# Altium PCB educationalBoard.PcbDoc
Units mm, origin at the board's own origin, x right, y up, seen from the top; angles counter-clockwise.
Board outline 89.28 x 76.33 mm, 2 copper layers (Top Layer, Bottom Layer); 78 components, 71 nets, 292 pads, 30 vias.
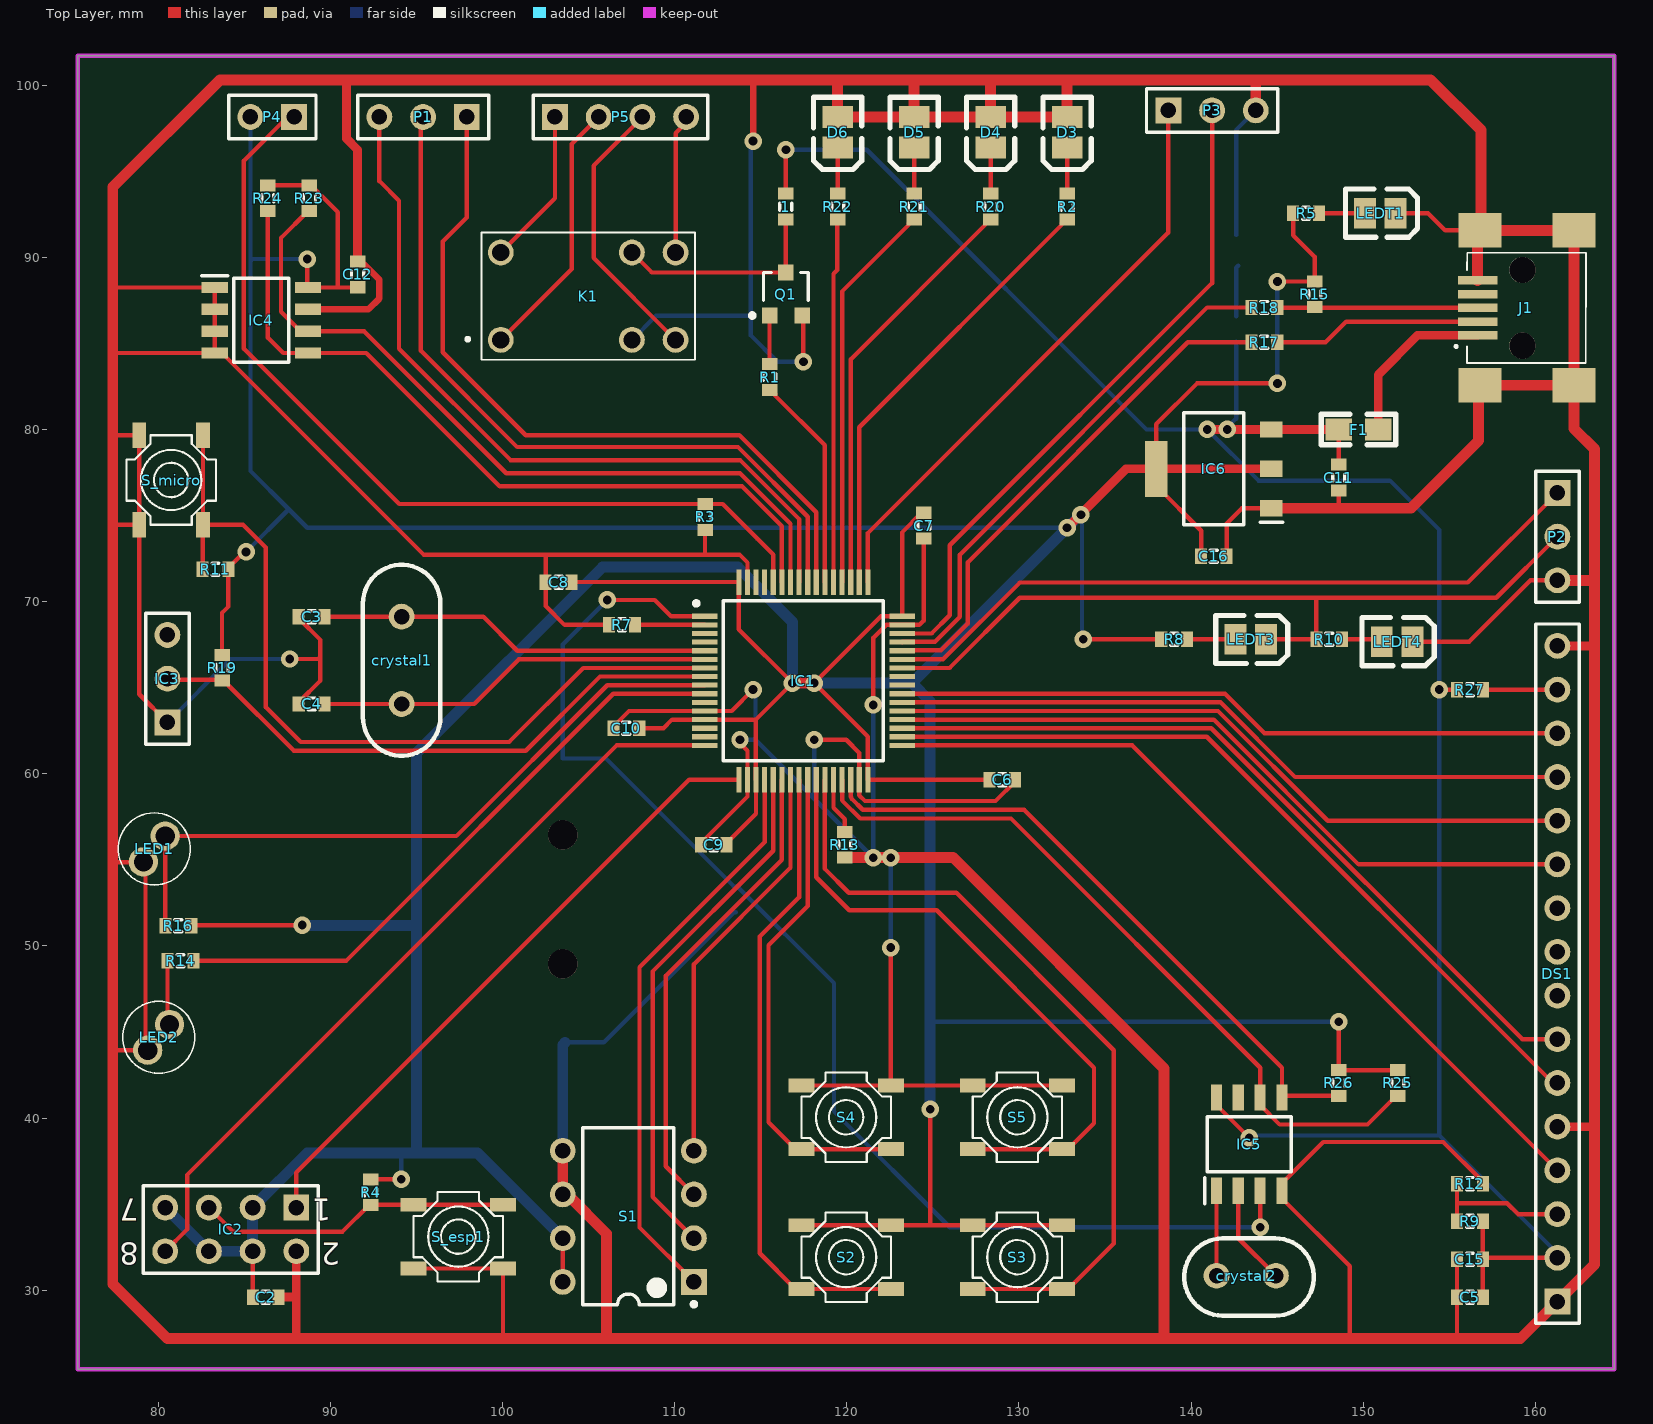
[diagram p0: Top Layer view]
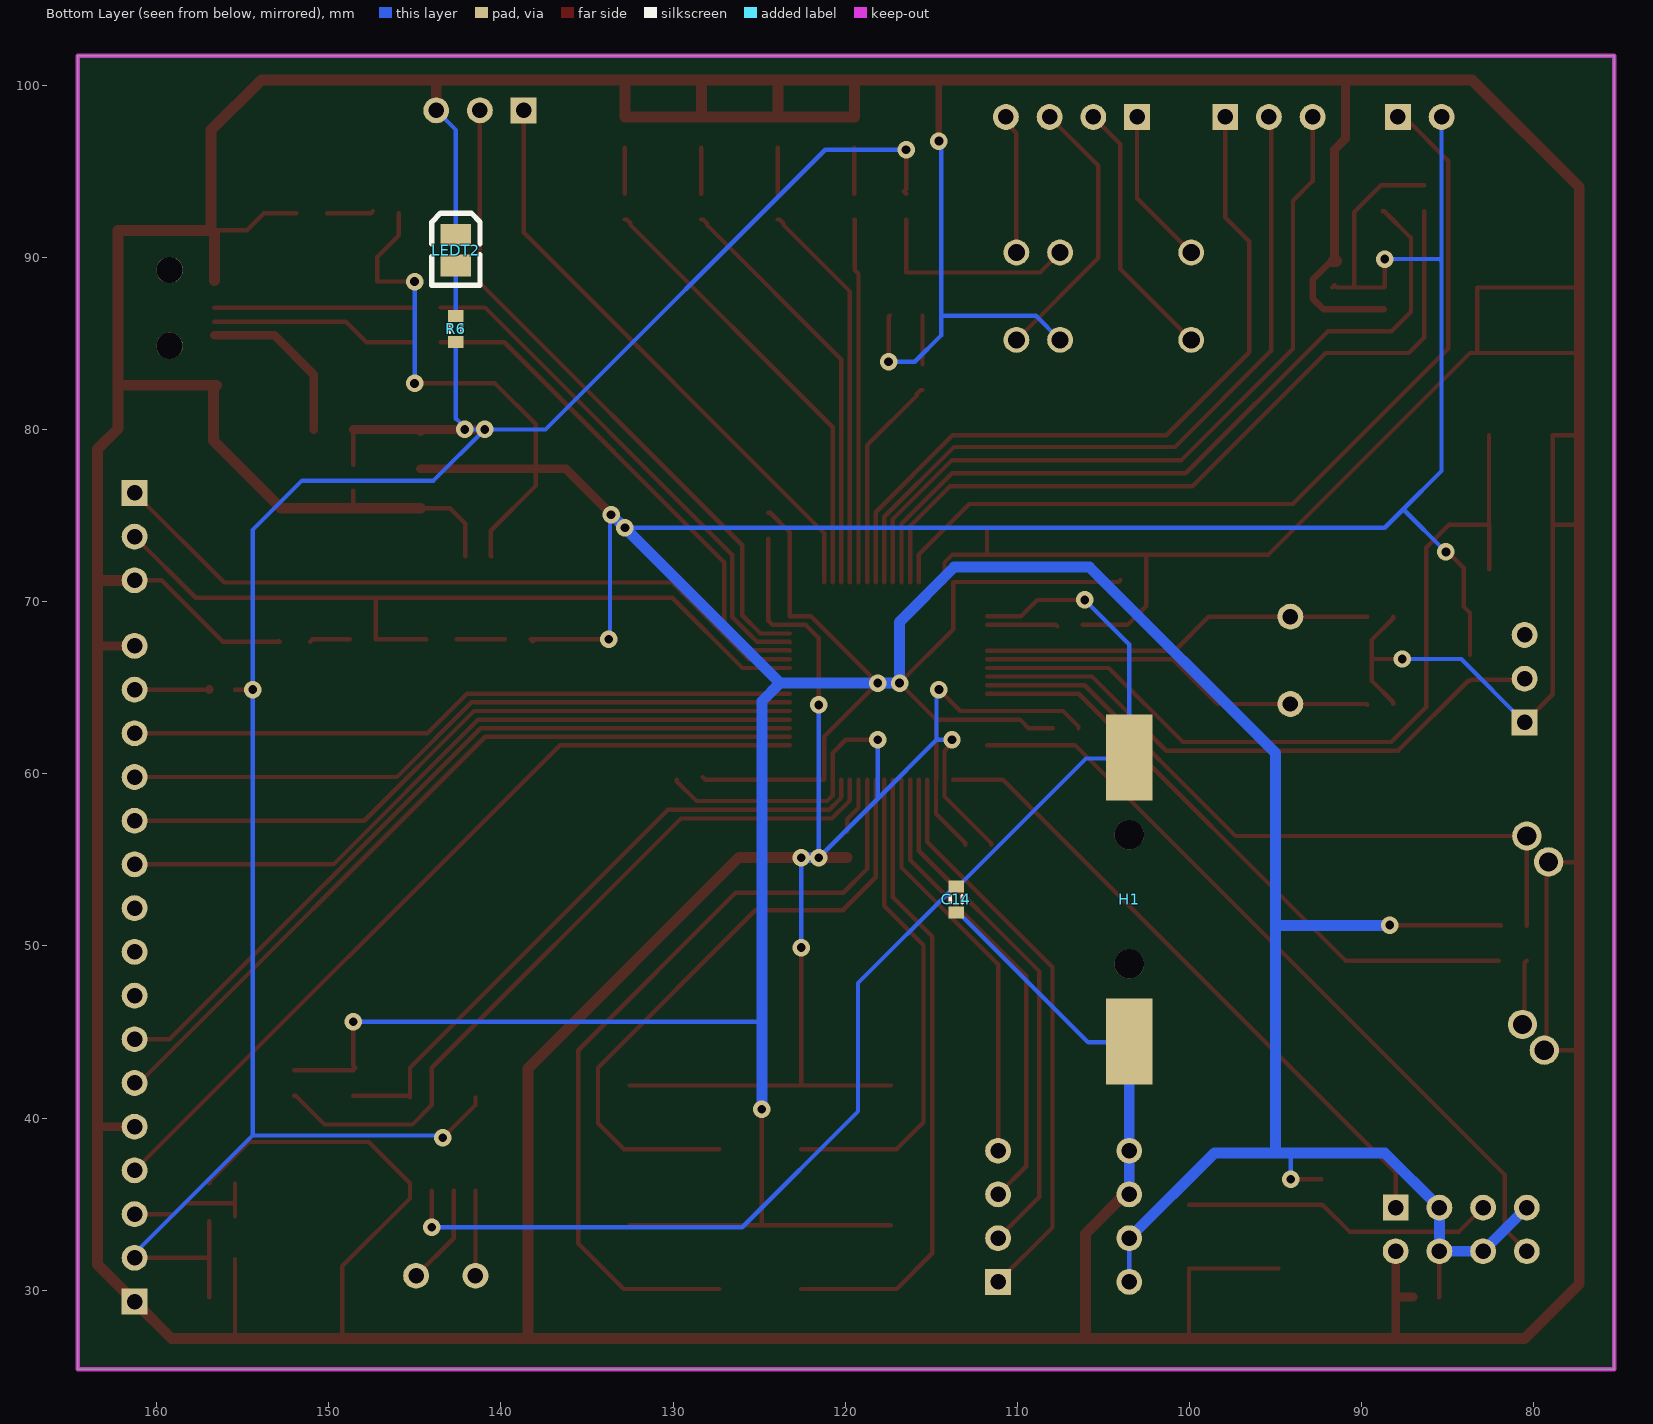
[diagram p1: Bottom Layer view, seen from below]

## Layer stack, top to bottom
Top Solder: solder mask 0.0102, Solder Resist, Dk 3.5
Top Layer: signal copper 0.0356
Dielectric 1: dielectric 0.32, FR-4, Dk 4.8
Bottom Layer: signal copper 0.0356
Bottom Solder: solder mask 0.0102, Solder Resist, Dk 3.5

## Board outline
75.311,25.4 164.592,25.4 164.592,101.727 75.311,101.727

## Design rules (kind name [scope] priority, off if disabled: settings)
Clearance [All] p1: gap=0.2 ignorepadtopadclearanceinfootprint=FALSE
PolygonConnect [All] p1: connectstyle=Relief reliefconductorwidth=0.254 reliefentries=4 polygonreliefangle="90 Angle" airgapwidth=0.254
RoutingVias [All] p1: holewidth=0.711 width=1.27 viastyle="Through Hole" minholewidth=0.711 minwidth=1.27 maxholewidth=0.711 maxwidth=1.27
SolderMaskExpansion [All] p1: expansion=0.102
Width [All] p1: maxlimit=1.27 minlimit=0.254 preferedwidth=0.254 minimp=50.000000 maximp=50.000000 favimp=50.000000
30 further rules are at their usual default settings.

## Components (designator, comment, footprint, x,y, rotation, side; value= is the part's Value field where it differs from the comment)
1 "Res" J1-0603 116.459,92.964 r90 top value=330
C2 "C0603" J1-0603 86.233,29.591 r0 top value=0.1uF
C3 "C0603" J1-0603 88.9,69.14 r0 top value=20pF
C4 "C0603" J1-0603 88.9,64.06 r0 top value=20pF
C5 "C0603" J1-0603 156.21,29.591 r180 top value=0.1uF
C6 "C0603" J1-0603 129.032,59.663 r0 top value=0.1uF
C7 "C0603" J1-0603 124.46,74.422 r270 top value=0.1uF
C8 "C0603" J1-0603 103.251,71.145 r180 top value=0.1uF
C9 "C0603" J1-0603 112.268,55.88 r180 top value=0.1uF
C10 "C0603" J1-0603 107.188,62.655 r180 top value=0.1uF
C11 "C0603" J1-0603 148.588,77.216 r270 top value=0.1uF
C12 "C0603" J1-0603 91.567,89.027 r90 top value=0.1uF
C14 "C0603" J1-0603 113.538,52.705 r270 bottom value=0.1uF
C15 "C0603" J1-0603 156.21,31.792 r180 top value=0.1uF
C16 "C0603" J1-0603 141.321,72.644 r0 top value=0.1uF
crystal1 "clockProducerDeep" "deep crystal" 93.98,66.675 r180 top
crystal2 "clockProducerDeep" "Deep Crystal small" 144.907,30.861 r90 top
D3 "LED3" 3518 132.8,97.282 r270 top
D4 "LED3" 3518 128.355,97.282 r270 top
D5 "LED3" 3518 123.91,97.282 r270 top
D6 "LED3" 3518 119.465,97.282 r270 top
DS1 "161A-BA-BC" HDR1X16 161.29,29.337 r90 top
F1 "Fuse 1" 0805 149.733,80.01 r0 top
H1 "2894" 2894 103.493,52.959 r270 bottom
IC1 "STM32F103RCT6" QFP50P1200X1200X160-64N 117.475,65.405 r0 top
IC2 "ESP-01" HDR2X4 88.011,34.798 r180 top
IC3 "LM335AZ_NOPB" HDR1X3 80.518,62.992 r90 top
IC4 "AT24C04C-SSHM-T" SOIC127P600X175-8N 85.979,86.36 r0 top
IC5 "DS1307Z+" SOIC127P600X175-8N 143.383,38.481 r90 top
IC6 "AMS1117-3.3" SOT229P700X180-4N 141.321,77.724 r180 top
J1 "usb type B" 0474910001 156.158,85.481 r180 top
K1 "TR5V_M-S-Z" TR5VMSZ 104.521,87.757 r0 top
LED1 "OP505A" OP505A 79.121,54.888 r90 top
LED2 "OP505A" OP505A 79.375,43.942 r90 top
LEDT1 "" 3518 151.003,92.583 r0 top
LEDT2 "" 3518 142.621,90.424 r90 bottom
LEDT3 "" 3518 143.464,67.812 r0 top
LEDT4 "" 3518 151.973,67.685 r0 top
P1 "Header 3" HDR1X3 97.917,98.171 r180 top
P2 "Header 3" HDR1X3 161.29,76.327 r270 top
P3 "Header 3" HDR1X3 138.684,98.552 r0 top
P4 "Header 2" HDR1X2 87.884,98.171 r180 top
P5 "Header 4" HDR1X4 103.039,98.171 r0 top
Q1 "2N2222" SOT-23 116.459,87.884 r0 top
R1 "Res" J1-0603 115.509,83.058 r90 top value=10K
R2 "Res1" j1-0603 132.8,92.964 r270 top value=330
R3 "Res1" J1-0603 111.76,74.93 r270 top value=10K
R4 "Res1" J1-0603 92.329,35.687 r90 top value=10K
R5 "Res1" j1-0603 146.685,92.583 r0 top value=330
R6 "Res1" j1-0603 142.621,85.852 r90 bottom value=330
R7 "Res1" J1-0603 106.934,68.655 r0 top value=10K
R8 "Res1" j1-0603 139.019,67.812 r0 top value=330
R9 "Res1" J1-0603 156.21,33.994 r0 top value=4.7K
R10 "Res1" j1-0603 148.036,67.812 r0 top value=330
R11 "Res1" J1-0603 83.312,71.882 r0 top value=10K
R12 "Res1" J1-0603 156.21,36.195 r180 top value=4.7K
R13 "Res1" J1-0603 119.888,55.88 r270 top value=10K
R14 "Res1" J1-0603 81.28,49.149 r180 top value=330
R15 "Res1" J1-0603 147.181,87.872 r90 top value=1.5k
R16 "Res1" J1-0603 81.153,51.181 r180 top value=1.5k
R17 "Res1" J1-0603 144.26,85.078 r180 top value=22
R18 "Res1" J1-0603 144.26,87.1 r180 top value=22
R19 "Res1" J1-0603 83.693,66.167 r90 top value=1.5k
R20 "Res1" j1-0603 128.355,92.964 r90 top value=330
R21 "Res1" j1-0603 123.91,92.964 r90 top value=330
R22 "Res1" j1-0603 119.465,92.964 r90 top value=330
R23 "Res1" J1-0603 88.773,93.445 r270 top value=4.7k
R24 "Res1" J1-0603 86.36,93.445 r270 top value=4.7k
R25 "Res1" J1-0603 152.019,42.037 r270 top value=4.7k
R26 "Res1" J1-0603 148.588,42.037 r270 top value=4.7k
R27 "Res1" J1-0603 156.21,64.897 r0 top value=330
S1 "SW-DIP4" DIP-8 107.303,34.29 r180 top
S2 "SW-PB" button 119.973,32.004 r180 top
S3 "SW-PB" button 129.925,32.004 r180 top
S4 "SW-PB" button 119.973,40.132 r180 top
S5 "SW-PB" button 129.925,40.132 r180 top
S_esp1 "SW-PB" button 97.409,33.02 r0 top
S_micro "SW-PB" button 80.645,77.089 r270 top

## Footprints (in the part's own frame and the unit in brackets; to place one, negate y for a bottom-side part, rotate by r counter-clockwise, add the part's x,y. Pads: shape width x height; smd on the part's side, far side on the other; paste and mask are expansions set on the pad)
0805 [mil]
  rect 60x50 smd: 1(-45,0) 2(45,0)
  silkscreen extent -85,-35 85,35
2894 [mm]
  rect 5x2.7 smd: 1(-8,0) 2(8.5,0)
  round 1.7 hole 1.7: 9(-3.5,0) 10(4,0)
3518 [mil]
  rect 50x70 smd: 1(35,0) 2(-35,0)
  silkscreen extent -80,-55 85,55
0474910001 [mm]
  rect 2.3x0.5 smd: 1(-0.5,0) 2(-0.5,-0.8) 3(-0.5,-1.6) 4(-0.5,-2.4) 5(-0.5,-3.2)
  round 1.524 hole 1.524: 7(-3.1,0.6) 8(-3.1,-3.8)
  rect 2.5x2 smd: MP1(-6.1,2.9) MP2(-0.625,2.9) MP3(-0.625,-6.1) MP4(-6.1,-6.1)
  silkscreen extent -6.8,-4.8 0.8,1.6
button [mm]
  rect 1.5x0.8 smd: 1(-2.587,1.939) 1(2.613,1.939) 2(-2.587,-1.761) 2(2.613,-1.761)
  silkscreen extent -2.59,-2.51 2.61,2.69, body extent -2.59,-2.51 2.64,2.69, height 2.2
"deep crystal" [mm]
  round 1.5 hole 0.9: 1(-0.15,-2.465) 2(-0.15,2.615)
  silkscreen extent -2.4,-5.47 2.1,5.62, body extent -2.44,-5.46 2.16,5.54, height 3.8
"Deep Crystal small" [mm]
  round 1.5 hole 0.9: 1(-0.025,-0.025) 2(-0.025,3.425)
  silkscreen extent -2.35,-2.23 2.15,5.3, body extent -2.4,-1.96 2.2,5.01, height 0.25
DIP-8 [mm] "DIP; 8 Leads; Row Spacing 7.62 mm; Pitch 2.54 mm"
  rect 1.5x1.5 hole 0.9: 1(-3.81,3.81)
  round 1.5 hole 0.9: 2(-3.81,1.27) 3(-3.81,-1.27) 4(-3.81,-3.81) 5(3.81,-3.81) 6(3.81,-1.27) 7(3.81,1.27) 8(3.81,3.81)
  silkscreen extent -3.94,-5.15 2.65,5.23, body extent -3.6,-5.15 3.6,5.15, height 5.08
HDR1X2 [mm] "Connector; Header; 2 Position"
  rect 1.5x1.5 hole 0.9: 1(0,0)
  round 1.5 hole 0.9: 2(2.54,0)
  silkscreen extent -1.27,-1.27 3.81,1.27
HDR1X3 [mm] "Connector; Header; 3 Position"
  rect 1.5x1.5 hole 0.9: 1(0,0)
  round 1.5 hole 0.9: 2(2.54,0) 3(5.08,0)
  silkscreen extent -1.27,-1.27 6.35,1.27
HDR1X4 [mm] "Connector; Header; 4 Position"
  rect 1.5x1.5 hole 0.9: 1(0,0)
  round 1.5 hole 0.9: 2(2.54,0) 3(5.08,0) 4(7.62,0)
  silkscreen extent -1.27,-1.27 8.89,1.27
HDR1X16 [mm] "Connector; Header; 16 Position"
  rect 1.5x1.5 hole 0.9: 1(0,0)
  round 1.5 hole 0.9: 2(2.54,0) 3(5.08,0) 4(7.62,0) 5(10.16,0) 6(12.7,0) 7(15.24,0) 8(17.78,0) 9(20.32,0) 10(22.86,0) 11(25.4,0) 12(27.94,0) 13(30.48,0) 14(33.02,0) 15(35.56,0) 16(38.1,0)
  silkscreen extent -1.27,-1.27 39.37,1.27
HDR2X4 [mm] "Connector; Header; 4x2 Position"
  rect 1.5x1.5 hole 0.9: 1(0,0)
  round 1.5 hole 0.9: 2(0,2.54) 3(2.54,0) 4(2.54,2.54) 5(5.08,0) 6(5.08,2.54) 7(7.62,0) 8(7.62,2.54)
  silkscreen extent -1.27,-1.27 8.89,3.81
J1-0603 [mm] "Chip Resistor, Body 1.6x0.8mm, IPC High Density"
  rect 0.7x0.9 smd: 1(-0.75,0) 2(0.75,0)
  silkscreen extent -0.2,-0.35 0.2,0.35, body extent -0.85,-0.48 0.85,0.48, height 0.9
j1-0603 [mm] "Chip Resistor, Body 1.6x0.8mm, IPC High Density"
  rect 0.7x0.9 smd: 1(-0.75,0) 2(0.75,0)
  silkscreen extent -0.2,-0.35 0.2,0.35, body extent -0.85,-0.48 0.85,0.48, height 0.9
OP505A [mm]
  round 1.7 hole 1.11: 1(0,0) 2(1.5,-1.27)
  silkscreen extent -1.34,-2.73 2.85,1.46, body extent -1.35,-2.73 2.85,1.46, height 5.94
QFP50P1200X1200X160-64N [mm]
  rect 1.475x0.3 smd: 1(-5.738,3.75) 2(-5.738,3.25) 3(-5.738,2.75) 4(-5.738,2.25) 5(-5.738,1.75) 6(-5.738,1.25) 7(-5.738,0.75) 8(-5.738,0.25) 9(-5.738,-0.25) 10(-5.738,-0.75) 11(-5.738,-1.25) 12(-5.738,-1.75) 13(-5.738,-2.25) 14(-5.738,-2.75) 15(-5.738,-3.25) 16(-5.738,-3.75) 33(5.738,-3.75) 34(5.738,-3.25) 35(5.738,-2.75) 36(5.738,-2.25) 37(5.738,-1.75) 38(5.738,-1.25) 39(5.738,-0.75) 40(5.738,-0.25) 41(5.738,0.25) 42(5.738,0.75) 43(5.738,1.25) 44(5.738,1.75) 45(5.738,2.25) 46(5.738,2.75) 47(5.738,3.25) 48(5.738,3.75)
  rect 0.3x1.475 smd: 17(-3.75,-5.738) 18(-3.25,-5.738) 19(-2.75,-5.738) 20(-2.25,-5.738) 21(-1.75,-5.738) 22(-1.25,-5.738) 23(-0.75,-5.738) 24(-0.25,-5.738) 25(0.25,-5.738) 26(0.75,-5.738) 27(1.25,-5.738) 28(1.75,-5.738) 29(2.25,-5.738) 30(2.75,-5.738) 31(3.25,-5.738) 32(3.75,-5.738) 49(3.75,5.738) 50(3.25,5.738) 51(2.75,5.738) 52(2.25,5.738) 53(1.75,5.738) 54(1.25,5.738) 55(0.75,5.738) 56(0.25,5.738) 57(-0.25,5.738) 58(-0.75,5.738) 59(-1.25,5.738) 60(-1.75,5.738) 61(-2.25,5.738) 62(-2.75,5.738) 63(-3.25,5.738) 64(-3.75,5.738)
  silkscreen extent -6.35,-4.65 4.65,4.65, body extent -6,-6 6,6, height 1.6
SOIC127P600X175-8N [mm]
  rect 1.525x0.65 smd: 1(-2.712,1.905) 2(-2.712,0.635) 3(-2.712,-0.635) 4(-2.712,-1.905) 5(2.712,-1.905) 6(2.712,-0.635) 7(2.712,0.635) 8(2.712,1.905)
  silkscreen extent -3.47,-2.45 1.6,2.58, body extent -3,-2.45 3,2.45, height 1.75
SOT229P700X180-4N [mm]
  rect 1.3x0.95 smd: 1(-3.35,2.29) 2(-3.35,0) 3(-3.35,-2.29)
  rect 1.3x3.25 smd: 4(3.35,0)
  silkscreen extent -4,-3.25 1.75,3.25, body extent -3.5,-3.25 3.5,3.25, height 1.8
SOT-23 [mm] "SOT-23; 3 Leads; Body 3.0 x 2.6 mm, inc. leads (LxW max)"
  rect 0.9x0.95 smd: 1(0,1.25) 2(-0.95,-1.25) 3(0.95,-1.25)
  silkscreen extent -2.07,-1.37 1.3,1.25, body extent -1.33,-0.38 1.33,1.25, height 2
TR5VMSZ [mm]
  round 1.5 hole 1: 1(-4.63,-2.54) 2(2.99,-2.54) 3(5.53,-2.54) 4(5.53,2.54) 5(2.99,2.54) 6(-4.63,2.54)
  silkscreen extent -6.65,-3.7 6.65,3.7, body extent -5.75,-3.7 6.65,3.7, height 9.1

## Part data
1 R1: "Semiconductor Resistor", LatestRevisionDate=17-Jul-2002, LatestRevisionNote="Re-released for DXP Platform.", PackageReference=AXIAL-0.5, Published=8-Jun-2000, Publisher="Altium Limited"
C2 C3 C4 C5 C6 C7 C8 C9 C10 C11 C12 C14 C15 C16: "Ceramic Chip Capacitor - Standard", PackageDocument=Mar-2001, Code_IPC="1608 [0603]", Code_JEITA=0603, ComponentLink1Description="Manufacturer Link", ComponentLink1URL=http://www.kemet.com/, ComponentLink2Description=Datasheet, ComponentLink2URL=http://www.kemet.com/kemet/web/homepage/kechome.nsf/vapubfilesname/F3102TA.pdf/$file/F3102TA.pdf, DatasheetDocument=Mar-2001, LatestRevisionDate=19-Mar-2004, LatestRevisionNote="Silkscreen size reduced.", Note="Footprint corresponds to dimensions for bulk cassette packaging. This case size has tightened tolerances.", PackageReference=0603, Published=17-Jul-2002, Publisher="Altium Limited"
crystal1 crystal2: library part "deep crystal"
D3 D4 D5 D6: "Typical BLUE SiC LED", DatasheetVersion=16-Apr-2002, LatestRevisionDate=17-Dec-2003, LatestRevisionNote="PCB Footprint replaced.", PackageDescription="SM LED; 2 C-Bend Leads; Body 3.5 x 2.8 x 1.9 mm, inc leads (LxWxH typ)", PackageReference=3.5X2.8X1.9, PackageVersion=16-Apr-2002, Published=8-Jun-2000, Publisher="Altium Limited"
DS1: "Display", Manufacturer_Name=Displaytech, Datasheet Link=https://docs-emea.rs-online.com/webdocs/06dd/0900766b806dda14.pdf, Height=11mm, Manufacturer_Part_Number=161A-BA-BC
F1: "Fuse", LatestRevisionDate=17-Jul-2002, LatestRevisionNote="Re-released for DXP Platform.", PackageDescription="Thru-Hole; 2 Leads", PackageReference=PIN-W2/E2.8, Published=8-Jun-2000, Publisher="Altium Limited"
H1: "Hardware", Manufacturer_Name="Keystone Electronics", Mouser Part Number=534-2894, Datasheet Link=https://www.keyelco.com/product-pdf.cfm?p=14467, Height=2.42mm, Manufacturer_Part_Number=2894, Mouser Price/Stock=https://www.mouser.co.uk/ProductDetail/Keystone-Electronics/2894?qs=u16ybLDytRb94n%2F3dXyVLQ%3D%3D
IC1: "Integrated Circuit", Manufacturer_Name=STMicroelectronics, Mouser Part Number=511-STM32F103RCT6, Arrow Part Number=STM32F103RCT6, Arrow Price/Stock=https://www.arrow.com/en/products/stm32f103rct6/stmicroelectronics, Datasheet Link=http://www.st.com/st-web-ui/static/active/en/resource/technical/document/datasheet/CD00191185.pdf, Height=1.6mm, Manufacturer_Part_Number=STM32F103RCT6, Mouser Price/Stock=https://www.mouser.co.uk/ProductDetail/STMicroelectronics/STM32F103RCT6?qs=%252BB84zevwoRA6TYzZIgOIoA%3D%3D
IC2: "Integrated Circuit", Manufacturer_Name=Ai-Thinker, Datasheet Link=http://wiki.ai-thinker.com/_media/esp8266/esp8266_series_modules_user_manual_v1.1.pdf, Height=2mm, Manufacturer_Part_Number=ESP-01
IC3: "Integrated Circuit", Arrow Part Number=LM335AZ/NOPB, Manufacturer_Name="Texas Instruments", Mouser Part Number=926-LM335AZ/NOPB, Arrow Price/Stock=https://www.arrow.com/en/products/lm335aznopb/texas-instruments, Datasheet Link=http://www.ti.com/general/docs/suppproductinfo.tsp?distId=10&gotoUrl=http%3A%2F%2Fwww.ti.com%2Flit%2Fgpn%2Flm135, Height=3.25mm, Manufacturer_Part_Number=LM335AZ/NOPB, Mouser Price/Stock=https://www.mouser.co.uk/ProductDetail/Texas-Instruments/LM335AZ-NOPB?qs=X1J7HmVL2ZHLFIuAm4Dkiw%3D%3D
IC4: "Integrated Circuit", Manufacturer_Name=Microchip, Mouser Part Number=556-AT24C04C-SSHM-T, Arrow Part Number=AT24C04C-SSHM-T, Arrow Price/Stock=https://www.arrow.com/en/products/at24c04c-sshm-t/microchip-technology, Datasheet Link=https://datasheet.lcsc.com/szlcsc/Microchip-Tech-AT24C04C-SSHM-T_C6205.pdf, Height=1.75mm, Manufacturer_Part_Number=AT24C04C-SSHM-T, Mouser Price/Stock=https://www.mouser.co.uk/ProductDetail/Microchip-Technology-Atmel/AT24C04C-SSHM-T?qs=rNaVQffb%252BtcPg4SMgvVriA%3D%3D
IC5: "Integrated Circuit", Manufacturer_Name="Maxim Integrated", Mouser Part Number=700-DS1307Z, Datasheet Link=http://datasheets.maximintegrated.com/en/ds/DS1307.pdf, Height=1.75mm, Manufacturer_Part_Number=DS1307Z+, Mouser Price/Stock=https://www.mouser.co.uk/ProductDetail/Maxim-Integrated/DS1307Z%2b?qs=0Y9aZN%252BMVCUvNDMAh9aCtw%3D%3D
IC6: library part AMS1117-1.5, "Integrated Circuit", Manufacturer_Name=ams, Datasheet Link=http://www.advanced-monolithic.com/pdf/ds1117.pdf, Height=1.8mm, Manufacturer_Part_Number=AMS1117-1.5
J1: library part 0474910001, "Connector", Manufacturer_Name=Molex, Arrow Part Number=0474910001, Arrow Price/Stock=https://www.arrow.com/en/products/0474910001/molex, Datasheet Link=https://www.molex.com/pdm_docs/sd/474910001_sd.pdf, Height=2.94mm, Manufacturer_Part_Number=0474910001
K1: "Relay or Contactor", Manufacturer_Name="TIANBO Electronics", Manufacturer_Part_Number="TR5V M-S-Z", Datasheet Link=http://www.datasheetspdf.com/pdf/702912/TIANBOGANGLIANELECTRONICS/TR5V/1, Height=9mm
LED1 LED2: "LED (Multiple)", Manufacturer_Name="OPTEK TECHNOLOGY", Mouser Part Number=828-OP505A, Arrow Part Number=OP505A, Arrow Price/Stock=https://www.arrow.com/en/products/op505a/optek-technology, Datasheet Link=http://docs-emea.rs-online.com/webdocs/13ff/0900766b813ff04e.pdf, Height=5.84mm, Manufacturer_Part_Number=OP505A, Mouser Price/Stock=https://www.mouser.co.uk/ProductDetail/Optek-TT-Electronics/OP505A?qs=MYMjFsmMg9aCx6EE%252BoFElA%3D%3D
LEDT1 LEDT2 LEDT3 LEDT4: library part LED3, "Typical BLUE SiC LED", PackageDocument=16-Apr-2002, DatasheetDocument=16-Apr-2002, LatestRevisionDate=17-Dec-2003, LatestRevisionNote="PCB Footprint replaced.", PackageReference=3.5X2.8X1.9, Published=8-Jun-2000, Publisher="Altium Limited"
P1 P2 P3: "Header, 3-Pin", LatestRevisionDate=17-Jul-2002, LatestRevisionNote="Re-released for DXP Platform.", Publisher="Altium Limited"
P4: "Header, 2-Pin", LatestRevisionDate=17-Jul-2002, LatestRevisionNote="Re-released for DXP Platform.", Publisher="Altium Limited"
P5: "Header, 4-Pin", LatestRevisionDate=17-Jul-2002, LatestRevisionNote="Re-released for DXP Platform.", Publisher="Altium Limited"
Q1: "NPN Bipolar Transistor", Code_JEDEC=TO-226-AA, LatestRevisionDate=17-Jul-2002, LatestRevisionNote="Re-released for DXP Platform.", PackageReference=TO-226, Published=8-Jun-2000, Publisher="Altium Limited"
R2 R3 R4 R5 R6 R7 R8 R9 R10 R11 R12 R13 R14 R15 R16 R17 R18 R19 R20 R21 R22 R23 R24 R25 R26 R27: "Resistor", LatestRevisionDate=17-Jul-2002, LatestRevisionNote="Re-released for DXP Platform.", PackageReference=AXIAL-0.3, Published=8-Jun-2000, Publisher="Altium Limited"
  R3 R4 R7 R9 R11 R12 R13 R14 R15 R16 R17 R18 R19 R23 R24 R25 R26 R27: PackageDescription="Axial Device, Thru-Hole; 2 Leads; 0.3 in Pin Spacing"
S1: "DIP Switch", LatestRevisionDate=17-Jul-2002, LatestRevisionNote="Re-released for DXP Platform.", PackageReference=DIP-8, Published=24-Mar-1999, Publisher="Altium Limited"
S2 S3 S4 S5 S_esp1 S_micro: "Switch", LatestRevisionDate=17-Jul-2002, LatestRevisionNote="Re-released for DXP Platform.", PackageReference=SPST-2, Published=24-Mar-1999, Publisher="Altium Limited"
  S2 S3 S4 S5: PackageDescription="Switch; 2 Leads"

## Via types
v1: diameter 1.016, hole 0.508, Top Layer to Bottom Layer, 30 vias

## Nets (pads, with @x,y where several pads share a name; then routed paths per layer and width w, separated by ;. In a path a pad name is that pad's centre, name@x,y a point inside that pad or via, vN(x,y) a via of type N, cw(c..) or ccw(c..) an arc to the next point about the centre after c; other vN are vias at no path point)
3.3v: C2.1 C6.1 C7.1 C8.1 C9.1 C10.1 C12.1 C16.1 IC1.13 IC1.19 IC1.32 IC1.48 IC1.64 IC2.3 IC2.4 IC2.6 IC2.7 IC4.8 IC6.2 IC6.4 P4.2 R4.2 R5.1 R8.1 R11.2 R15.2 R16.1 R19.2 R23.1 R24.1 R25.1 R26.1 S1.7 S1.8 S2.2 S3.2 | length 421.7
  Top Layer w0.254: R16.1 81.903,51.212 v1(88.361,51.212) ; R19.2 83.693,69.354 84.062,69.723 R11.2 84.062,71.982 84.978,72.898 v1(85.09,72.898) ; IC2.4 85.477,32.252 85.477,29.597 C2.1 ; IC2.3 IC2.3@85.477,34.792 ; R24.1 R23.1 88.873,94.195 90.424,92.644 90.424,88.265 ; v1(88.646,89.916) 88.646,88.31 IC4.8 90.424,88.265 ; C12.1@91.567,88.384 91.448,88.265 90.424,88.265 ; C12.1@91.567,88.404 C12.1@91.706,88.265 ; R4.2 92.335,36.443 94.101,36.443 v1(94.107,36.449) ; S1.8 S1.7 ; C8.1@104.001,71.247 104.103,71.145 113.723,71.145 IC1.64 113.725,68.393 v1(116.84,65.278) 114.717,63.155 ; C10.1 109.347,62.655 109.847,63.155 IC1.13 114.717,63.155 ; C9.1 113.018,55.98 114.725,57.687 IC1.19 114.717,59.675 114.717,63.155 ; S2.2@117.359,33.765 122.559,33.765 124.841,33.765 ; C7.1 124.36,75.172 123.213,74.025 IC1.48 121.987,69.155 v1(118.11,65.278) 121.225,62.163 IC1.32 128.132,59.667 C6.1@128.282,59.817 ; v1(124.841,40.513) 124.841,33.765 ; S3.2@132.512,33.765 127.312,33.765 124.841,33.765 ; v1(133.731,67.818) R8.1@138.021,67.818 ; C16.1 140.589,72.662 140.589,74.131 137.971,76.749 IC6.4 137.971,80.313 140.347,82.689 v1(145.022,82.689) ; v1(145.022,88.61) 147.169,88.61 R15.2 147.181,90.043 145.935,91.289 R5.1 ; v1(148.59,45.593) 148.59,43.039 148.463,42.912 R26.1 R25.1 ; R8.1@138.021,67.818 138.148,67.691 R8.1 138.263,67.818 R8.1@138.021,67.818
  Top Layer w0.508: v1(132.8,74.295) 136.229,77.724 IC6.4 IC6.2
  Top Layer w0.635: v1(116.84,65.278) v1(118.11,65.278)
  Bottom Layer w0.254: v1(85.09,72.898) 87.566,75.374 ; P4.2 85.344,89.789 ; v1(88.646,89.916) 85.471,89.916 85.344,89.789 ; v1(94.107,36.449) 94.107,37.973 ; S1.8 S1.7 ; 124.841,45.593 v1(148.59,45.593) ; v1(132.8,74.295) 88.646,74.295 87.566,75.374 ; v1@133.562,75.057 v1(133.604,75.057) ; v1(133.731,67.818) 133.667,67.882 133.667,74.867 v1@133.731,74.93 ; v1(145.022,82.689) v1(145.022,88.61) ; 85.344,89.789 85.344,77.597 87.566,75.374
  Bottom Layer w0.635: IC2.7 IC2.6 IC2.4 IC2.3 88.646,37.973 94.107,37.973 94.996,37.973 ; v1(88.361,51.212) 88.392,51.181 94.996,51.181 ; S1.7 98.54,37.973 94.996,37.973 ; v1(124.841,40.513) 124.841,45.593 124.841,64.22 123.783,65.278 ; v1@133.562,75.057 v1(132.8,74.295) 123.783,65.278 ; 94.996,37.973 94.996,51.181 ; 94.996,51.181 94.996,61.214 105.791,72.009 113.665,72.009 116.84,68.834 v1(116.84,65.278) v1(118.11,65.278) 123.783,65.278
5v: 1.2 C5.1 C11.1 C15.1 DS1.2 F1.1 IC5.8 IC6.3 R6.1 R9.2 R27.1 | length 135.4
  Top Layer w0.254: 1.2 116.586,93.841 116.459,93.968 v1(116.459,96.266) ; IC5.8 141.478,40.756 143.372,38.862 v1(143.383,38.862) ; C11.1 148.588,80.008 F1.1 ; v1(154.432,64.897) R27.1 ; C5.1 C15.1 ; R9.2 C15.1 ; DS1.2 157.045,31.877 C15.1
  Top Layer w0.508: v1@140.948,80.012 v1(140.95,80.014) v1(142.113,80.014) IC6.3@144.544,80.014 ; IC6.3@144.536,80.022 IC6.3@144.544,80.014 ; IC6.3@144.671,79.887 IC6.3@144.546,80.012 ; IC6.3 IC6.3@144.544,80.014 ; F1.1 148.588,80.012 IC6.3@144.546,80.012 ; IC6.3@144.544,80.014 IC6.3@144.546,80.012
  Bottom Layer w0.254: v1(116.459,96.266) 121.158,96.266 137.41,80.014 v1(140.95,80.014) ; R6.1 142.621,80.645 142.113,80.137 v1(142.113,80.014) v1(140.95,80.014) ; v1(143.383,38.862) 143.51,38.989 154.432,38.989 ; DS1.2 161.29,32.131 154.432,38.989 ; v1(140.95,80.014) 143.922,77.042 151.558,77.042 154.432,74.168 v1(154.432,64.897) 154.432,38.989
BOOT0: IC1.60 P4.1 R3.1 | length 52.2
  Top Layer w0.254: P4.1 87.503,98.171 84.963,95.631 84.963,84.709 93.992,75.68 R3.1 112.788,75.68 114.796,73.672 115.725,72.743 IC1.60
DB0: DS1.7 IC1.35 | length 45.6
  Top Layer w0.254: IC1.35 141.179,62.655 159.257,44.577 DS1.7
DB4: DS1.11 IC1.36 | length 41.6
  Top Layer w0.254: IC1.36 141.321,63.155 149.739,54.737 DS1.11
DB5: DS1.12 IC1.37 | length 40.7
  Top Layer w0.254: IC1.37 141.57,63.655 147.948,57.277 DS1.12
DB6: DS1.13 IC1.38 | length 39.9
  Top Layer w0.254: IC1.38 141.712,64.155 146.05,59.817 DS1.13
DB7: DS1.14 IC1.39 | length 39
  Top Layer w0.254: IC1.39 141.974,64.655 144.272,62.357 DS1.14
EEPROM_SCL: IC1.58 IC4.6 R23.2 | length 44.7
  Top Layer w0.254: R23.2 88.673,92.695 87.122,91.144 87.122,86.857 88.254,85.725 IC4.6 91.948,85.725 100.203,77.47 113.792,77.47 116.725,74.537 IC1.58
EEPROM_SDA: IC1.59 IC4.5 R24.2 | length 45
  Top Layer w0.254: R24.2 86.36,85.344 87.249,84.455 IC4.5 92.075,84.455 99.822,76.708 113.907,76.708 116.225,74.39 IC1.59
ESP_Rx: IC1.16 IC2.8 | length 45.4
  Top Layer w0.254: IC2.8 81.661,33.528 81.661,36.693 106.623,61.655 IC1.16
ESP_Tx: IC1.17 IC2.1 | length 37.2
  Top Layer w0.254: IC2.1 88.011,36.83 110.848,59.667 IC1.17
fuse_5v: F1.2 J1.1 | length 9.9
  Top Layer w0.508: F1.2 150.876,83.195 153.162,85.481 J1.1
GND: C2.2 C3.1 C4.1 C5.2 C6.2 C7.2 C8.2 C9.2 C10.2 C11.2 C12.2 C14.2 C15.2 C16.2 D3.2 D4.2 D5.2 D6.2 DS1.1 DS1.5 DS1.16 H1.2 IC1.12 IC1.18 IC1.31 IC1.47 IC1.63 IC2.2 IC3.1 IC4.1 IC4.2 IC4.3 IC4.4 IC4.7 IC5.4 IC6.1 J1.5 J1.MP1 J1.MP2 J1.MP3 J1.MP4 K1.2 LED1.1 LED2.1 LEDT1.1 LEDT2.1 LEDT4.1 P2.3 P3.3 Q1.3 R3.2 R7.1 R12.1 R13.2 S1.5 S1.6 S4.2 S5.2 S_esp1.2 S_micro.2 | length 770.4
  Top Layer w0.254: 77.343,43.942 LED2.1 79.248,44.069 79.248,54.761 LED1.1 79.097,54.864 77.343,54.864 ; 77.343,74.422 77.397,74.476 S_micro.2@78.884,74.476 ; 77.343,79.756 77.423,79.676 78.884,79.676 S_micro.2@78.884,74.476 ; 77.343,84.455 IC4.4 ; 77.343,88.392 77.47,88.265 IC4.1 IC4.2 IC4.3 IC4.4 ; IC3.1 78.884,64.626 S_micro.2@78.884,74.476 ; v1(87.63,66.675) 89.281,66.675 89.408,66.802 ; C4.1 88.15,64.16 89.408,65.418 89.408,66.802 ; C3.1 88.15,69.04 89.408,67.782 89.408,66.802 ; S_esp1.2@94.822,31.259 100.022,31.259 100.022,27.232 100.076,27.178 ; R7.1 103.599,68.655 102.501,69.753 C8.2 102.501,72.731 102.489,72.743 ; C10.2 106.438,62.755 107.338,63.655 IC1.12 113.312,63.655 v1(114.554,64.897) ; C9.2 111.518,55.98 114.225,58.687 IC1.18 114.225,61.337 113.792,61.77 v1(113.792,61.976) ; R3.2 111.76,72.743 ; IC1.63 114.225,72.278 113.76,72.743 111.76,72.743 ; S4.2@117.359,41.893 S4.2@122.559,41.893 ; Q1.3 117.475,86.568 v1(117.475,83.947) ; v1(118.11,61.976) 119.963,61.976 120.725,61.214 IC1.31 120.725,58.749 121.054,58.42 128.639,58.42 129.782,59.563 C6.2 ; v1(121.539,64.008) 121.539,67.901 122.293,68.655 IC1.47 124.214,68.655 124.46,68.901 C7.2 ; v1@122.555,49.911 v1(122.559,49.907) S4.2@122.559,41.893 ; S5.2@132.512,41.893 127.312,41.893 S4.2@122.559,41.893 ; C16.2 142.071,74.549 142.956,75.434 IC6.1 ; C11.2 148.588,75.436 148.59,75.434 ; 149.225,27.178 149.225,31.394 145.288,35.331 IC5.4 145.288,36.206 147.69,38.608 154.647,38.608 156.96,36.295 R12.1 ; LEDT1.1 153.773,92.583 154.775,91.581 J1.MP3 ; LEDT4.1@152.897,67.72 LEDT4.1 156.164,67.685 159.726,71.247 P2.3 ; 155.448,27.178 155.46,27.19 C5.2 C15.2 ; IC4.4 83.693,84.455 95.405,72.743 102.489,72.743 ; 102.489,72.743 111.76,72.743
  Top Layer w0.381: IC4.7 92.202,86.995 92.837,87.63 92.837,88.714 C12.2@91.667,89.884 ; v1(114.554,96.774) 114.554,100.33
  Top Layer w0.508: C2.2 86.989,29.597 88.011,29.597 ; IC2.2 88.011,29.597 ; 88.138,27.178 88.011,27.305 88.011,29.597 ; 90.932,100.33 90.932,96.901 91.567,96.266 C12.2 ; DS1.5 163.449,39.497 ; DS1.16 163.449,67.437
  Top Layer w0.635: C12.2@91.434,89.81 91.467,89.777 C12.2 C12.2@91.667,89.777 ; S1.5 S1.6 103.759,35.56 106.045,33.274 106.045,27.178 ; R13.2 v1(121.539,55.13) 126.181,55.13 138.43,42.881 138.43,27.178 ; P3.3 143.764,100.33 ; IC6.1 148.59,75.434 152.789,75.434 156.718,79.363 156.718,82.396 156.533,82.581 J1.MP2 J1.MP1 ; J1.5 156.658,91.456 J1.MP3 ; P2.3 163.449,71.247 ; 106.045,27.178 138.43,27.178 ; 106.045,27.178 100.076,27.178 88.138,27.178 80.518,27.178 77.343,30.353 77.343,43.942 77.343,54.864 77.343,74.422 77.343,79.756 77.343,84.455 77.343,88.392 77.343,94.107 83.566,100.33 90.932,100.33 114.554,100.33 119.38,100.33 ; 119.38,100.33 123.825,100.33 ; 119.38,100.33 119.465,100.245 D6.2 D5.2 ; 123.825,100.33 128.27,100.33 ; 123.825,100.33 123.91,100.245 D5.2 ; D5.2 D4.2 ; 128.27,100.33 132.715,100.33 ; 128.27,100.33 128.355,100.245 D4.2 ; D4.2 D3.2 132.8,100.245 132.715,100.33 ; 132.715,100.33 143.764,100.33 ; 138.43,27.178 149.225,27.178 155.448,27.178 159.131,27.178 DS1.1 163.449,31.496 163.449,39.497 163.449,67.437 163.449,71.247 ; 143.764,100.33 153.924,100.33 156.845,97.409 156.845,91.643 J1.MP3 ; J1.MP3 J1.MP4 J1.MP1 ; J1.MP1 162.258,80.058 163.449,78.867 163.449,71.247
  Bottom Layer w0.254: IC3.1 84.201,66.675 v1(87.63,66.675) ; H1.2@103.632,44.395 105.878,44.395 113.438,51.955 C14.2 ; K1.2@107.95,85.217 K1.2 108.908,86.614 114.427,86.614 ; v1@114.046,61.976 114.693,61.976 ; v1(114.554,64.897) 114.693,64.758 114.693,61.976 ; v1(114.554,96.774) 114.427,96.647 114.427,86.614 ; v1(117.475,83.947) 115.951,83.947 114.427,85.471 114.427,86.614 ; v1(118.11,61.976) 118.11,58.559 ; v1(121.539,64.008) v1(121.539,55.13) 118.11,58.559 ; v1(122.559,49.907) v1(122.559,55.118) ; LEDT2.1 142.621,97.409 P3.3 ; 114.693,61.976 118.11,58.559
  Bottom Layer w0.635: S1.6 S1.5 103.493,44.256 H1.2@103.632,44.395 ; v1(121.539,55.13) 121.545,55.124 122.553,55.124 v1(122.559,55.118)
IRReceiverADC: IC1.9 LED1.2 R16.2 | length 40.2
  Top Layer w0.254: R16.2 80.397,51.187 80.397,56.382 LED1.2 97.311,56.388 106.078,65.155 IC1.9
IRTransmitter: IC1.10 R14.1 | length 36.1
  Top Layer w0.254: R14.1 90.92,49.149 106.426,64.655 IC1.10
LCD_Enable: DS1.6 IC1.34 | length 46.4
  Top Layer w0.254: IC1.34 140.918,62.155 161.036,42.037 DS1.6
LCD_RS: DS1.4 IC1.33 | length 48.3
  Top Layer w0.254: IC1.33 136.592,61.655 DS1.4
LM335ADC: IC1.8 IC3.2 R19.1 | length 34.7
  Top Layer w0.254: IC3.2 80.576,65.474 83.635,65.474 R19.1 83.793,65.417 87.869,61.341 101.346,61.341 105.66,65.655 IC1.8
Micro_Reset: IC1.7 R11.1 S_micro.1 | length 49.3
  Top Layer w0.254: R11.1 82.562,74.454 82.584,74.476 S_micro.1@82.584,79.676 ; S_micro.1@82.689,74.476 84.909,74.476 86.233,73.152 86.233,63.881 88.265,61.849 100.375,61.849 104.681,66.155 IC1.7
NetC3_2: C3.2 crystal1.1 IC1.5 | length 22.9
  Top Layer w0.254: C3.2 crystal1.1 98.869,69.14 100.854,67.155 IC1.5
NetC4_2: C4.2 crystal1.2 IC1.6 | length 23.2
  Top Layer w0.254: C4.2@89.65,64.008 89.702,64.06 crystal1.2 98.35,64.06 100.945,66.655 IC1.6
Netcrystal2_1: crystal2.1 IC5.2 | length 5.8
  Top Layer w0.254: IC5.2 142.748,33.02 crystal2.1
Netcrystal2_2: crystal2.2 IC5.1 | length 4.9
  Top Layer w0.254: IC5.1 141.48,35.767 141.48,30.838 crystal2.2
NetD3_1: D3.1 R2.1 | length 2.7
  Top Layer w0.254: R2.1 D3.1
NetD4_1: D4.1 R20.2 | length 2.7
  Top Layer w0.254: R20.2 D4.1
NetD5_1: D5.1 R21.2 | length 2.7
  Top Layer w0.254: R21.2 D5.1
NetD6_1: D6.1 R22.2 | length 2.7
  Top Layer w0.254: R22.2 D6.1
NetDS1_3: DS1.3 R9.1 R12.2 | length 8
  Top Layer w0.254: R9.1@155.46,34.29 155.46,35.052 ; R12.2 155.46,35.052 ; DS1.3 159.004,34.417 158.369,35.052 155.46,35.052
NetDS1_15: DS1.15 R27.2 | length 4.3
  Top Layer w0.254: R27.2 DS1.15
NetIC1_2: IC1.2 R7.2 | length 4.1
  Top Layer w0.254: R7.2@107.684,68.586 107.753,68.655 IC1.2
NetIC1_28: IC1.28 R13.1 | length 3.3
  Top Layer w0.254: IC1.28 119.225,58.025 119.888,57.362 R13.1
NetJ1_2: J1.2 R17.1 | length 12.1
  Top Layer w0.254: R17.1 147.816,85.078 149.019,86.281 J1.2
NetJ1_3: J1.3 R15.1 R18.1 | length 11.7
  Top Layer w0.254: R18.1 145.029,87.081 J1.3
NetLED2_2: LED2.2 R14.2 | length 3.8
  Top Layer w0.254: R14.2@80.403,49.149 80.524,49.028 80.524,45.563 LED2.2
NetLEDT1_1: LEDT1.2 R5.2 | length 2.7
  Top Layer w0.254: R5.2@147.435,92.71 147.562,92.583 LEDT1.2
NetLEDT2_1: LEDT2.2 R6.2 | length 3
  Bottom Layer w0.254: R6.2 142.621,89.408 LEDT2.2@142.748,89.535
NetLEDT3_1: LEDT3.2 R8.2 | length 2.8
  Top Layer w0.254: R8.2 LEDT3.2
NetLEDT4_1: LEDT4.2 R10.2 | length 2.4
  Top Layer w0.254: R10.2 150.957,67.812 LEDT4.2
NetQ1_2: Q1.2 R1.2 | length 2.8
  Top Layer w0.254: R1.2 Q1.2
PA15: IC1.50 R2.2 | length 26.1
  Top Layer w0.254: IC1.50 120.725,80.139 132.477,91.891 132.477,91.991 132.7,92.214 R2.2
PB3: IC1.55 P1.1 | length 43.9
  Top Layer w0.254: P1.1 97.917,92.329 96.52,90.932 96.52,84.502 101.346,79.676 113.757,79.676 118.225,75.208 IC1.55
PB4: IC1.56 P1.2 | length 43.9
  Top Layer w0.254: P1.2@95.25,98.171 95.25,84.582 100.838,78.994 113.679,78.994 117.725,74.948 IC1.56
PB5: IC1.57 P1.3 | length 44.9
  Top Layer w0.254: P1.3 92.837,94.446 93.98,93.303 93.98,84.709 100.457,78.232 113.798,78.232 117.225,74.805 IC1.57
PC10: IC1.51 R20.1 | length 24.5
  Top Layer w0.254: IC1.51 120.225,84.084 128.032,91.891 128.032,91.991 128.255,92.214 R20.1
PC11: IC1.52 R21.1 | length 22.9
  Top Layer w0.254: IC1.52 119.725,88.029 123.587,91.891 123.587,91.991 123.81,92.214 R21.1
PC12: IC1.53 R22.1 | length 21.2
  Top Layer w0.254: IC1.53 119.225,89.058 119.448,89.281 119.448,92.214 R22.1
prog_Rx: IC1.43 P2.1 | length 42.1
  Top Layer w0.254: IC1.43 125.59,66.655 130.055,71.12 156.083,71.12 P2.1
prog_Tx: IC1.42 LEDT3.1 P2.2 R10.1 | length 46.6
  Top Layer w0.254: IC1.42 125.972,66.155 130.048,70.231 147.32,70.231 ; LEDT3.1 R10.1 147.286,70.197 147.32,70.231 ; P2.2 157.734,70.231 147.32,70.231
pushButton1: IC1.24 S2.1 | length 37
  Top Layer w0.254: IC1.24 117.225,52.836 114.935,50.546 114.935,32.14 117.009,30.065 117.359,30.065 S2.1@122.559,30.065
pushButton2: IC1.27 S3.1 | length 46.9
  Top Layer w0.254: IC1.27 118.725,54.476 120.115,53.086 126.365,53.086 135.509,43.942 135.509,32.713 132.862,30.065 132.512,30.065 S3.1@127.312,30.065
pushButton3: IC1.25 S4.1 | length 28.6
  Top Layer w0.254: IC1.25 117.729,59.663 117.729,52.324 115.452,50.047 115.452,39.751 117.009,38.193 117.359,38.193 S4.1@122.559,38.193
pushButton4: IC1.26 S5.1 | length 37.3
  Top Layer w0.254: IC1.26 118.225,53.987 120.142,52.07 125.222,52.07 134.366,42.926 134.366,39.698 132.862,38.193 132.512,38.193 S5.1@127.312,38.193
RELAY_COIL_3.3: IC1.54 R1.1 | length 12.6
  Top Layer w0.254: R1.1 115.609,82.308 115.832,82.085 115.832,81.985 118.725,79.092 IC1.54
RELAY_COIL_5: 1.1 K1.5 Q1.1 | length 12.5
  Top Layer w0.254: K1.5 108.674,89.134 Q1.1 1.1
RELAY_COM1: K1.1 P5.2 | length 15.3
  Top Layer w0.254: K1.1 104.013,89.339 104.013,96.605 P5.2
RELAY_COM2: K1.6 P5.1 | length 9.2
  Top Layer w0.254: K1.6 103.039,93.445 P5.1
RELAY_NC: K1.4 P5.4 | length 8.1
  Top Layer w0.254: K1.4 110.051,97.226 110.659,97.834 P5.4
RELAY_NO: K1.3 P5.3 | length 16.4
  Top Layer w0.254: P5.3 105.283,95.335 105.283,89.985 K1.3 K1.3@110.363,85.217
reset_esp: IC2.5 R4.1 S_esp1.1 | length 18.3
  Top Layer w0.254: IC2.5 84.328,33.401 90.693,33.401 92.229,34.937 R4.1 92.351,34.959 94.822,34.959 S_esp1.1@100.022,34.959
RTC_SCL: IC1.29 IC5.6 R25.2 | length 43.3
  Top Layer w0.254: IC1.29 119.725,58.456 120.777,57.404 129.54,57.404 144.018,42.926 IC5.6 144.018,40.756 145.15,39.624 150.256,39.624 151.919,41.287 R25.2
RTC_SDA: IC1.30 IC5.5 R26.2 | length 37.7
  Top Layer w0.254: IC1.30 120.225,58.674 120.271,58.628 120.271,58.561 120.92,57.912 130.302,57.912 145.288,42.926 IC5.5 145.382,41.287 R26.2
SWCLK: IC1.49 P3.1 | length 34.6
  Top Layer w0.254: IC1.49 121.225,73.993 138.684,91.452 P3.1
SWDIO: IC1.46 P3.2 | length 38.9
  Top Layer w0.254: IC1.46 124.924,68.155 125.984,69.215 125.984,73.279 141.224,88.519 P3.2
switch1: IC1.20 S1.1 | length 33.5
  Top Layer w0.254: S1.1 107.95,33.643 107.95,48.768 115.225,56.043 IC1.20
switch2: IC1.21 S1.2 | length 30.5
  Top Layer w0.254: S1.2 108.712,35.421 108.712,48.514 115.725,55.527 IC1.21
switch3: IC1.22 S1.3 | length 27.6
  Top Layer w0.254: S1.3 109.474,37.199 109.474,48.26 116.225,55.011 IC1.22
switch4: IC1.23 S1.4 | length 23.9
  Top Layer w0.254: S1.4 111.113,48.941 116.725,54.553 IC1.23
USB_DM: IC1.44 R17.2 | length 29.8
  Top Layer w0.254: IC1.44 123.236,67.178 125.471,67.178 127.025,68.732 127.025,72.288 139.815,85.078 R17.2
USB_DP: IC1.45 R18.2 | length 30.5
  Top Layer w0.254: IC1.45 123.236,67.678 125.126,67.678 126.571,69.123 126.571,72.735 140.936,87.1 R18.2
VBAT: C14.1 H1.1 IC1.1 IC5.3 | length 74.6
  Top Layer w0.254: v1(106.078,70.104) 108.839,70.104 109.788,69.155 IC1.1 ; v1(144.018,33.655) IC5.3
  Bottom Layer w0.254: v1(106.078,70.104) 103.493,67.519 H1.1 103.493,60.895 105.998,60.895 113.438,53.455 C14.1 113.638,53.455 119.253,47.84 119.253,40.386 125.984,33.655 v1(144.018,33.655)
pads on no net: DS1.8 DS1.9 DS1.10 H1.9 H1.10 IC1.3 IC1.4 IC1.11 IC1.14 IC1.15 IC1.40 IC1.41 IC1.61 IC1.62 IC3.3 IC5.7 J1.4 J1.7 J1.8

## Keep-outs
Keep-Out Layer:
  the board outline again, w0.254

## Text inside footprints (layer, text, board x,y; h text height)
IC2: Top Overlay "2" at 90.551,32.766 h1.27 r180; Top Overlay "1" at 90.043,35.306 h1.27 r180; Top Overlay "7" at 78.867,35.306 h1.27 r180; Top Overlay "8" at 78.867,32.766 h1.27 r180